# EAGLE board Antenna Board v2 (EAGLE 9.6.2)
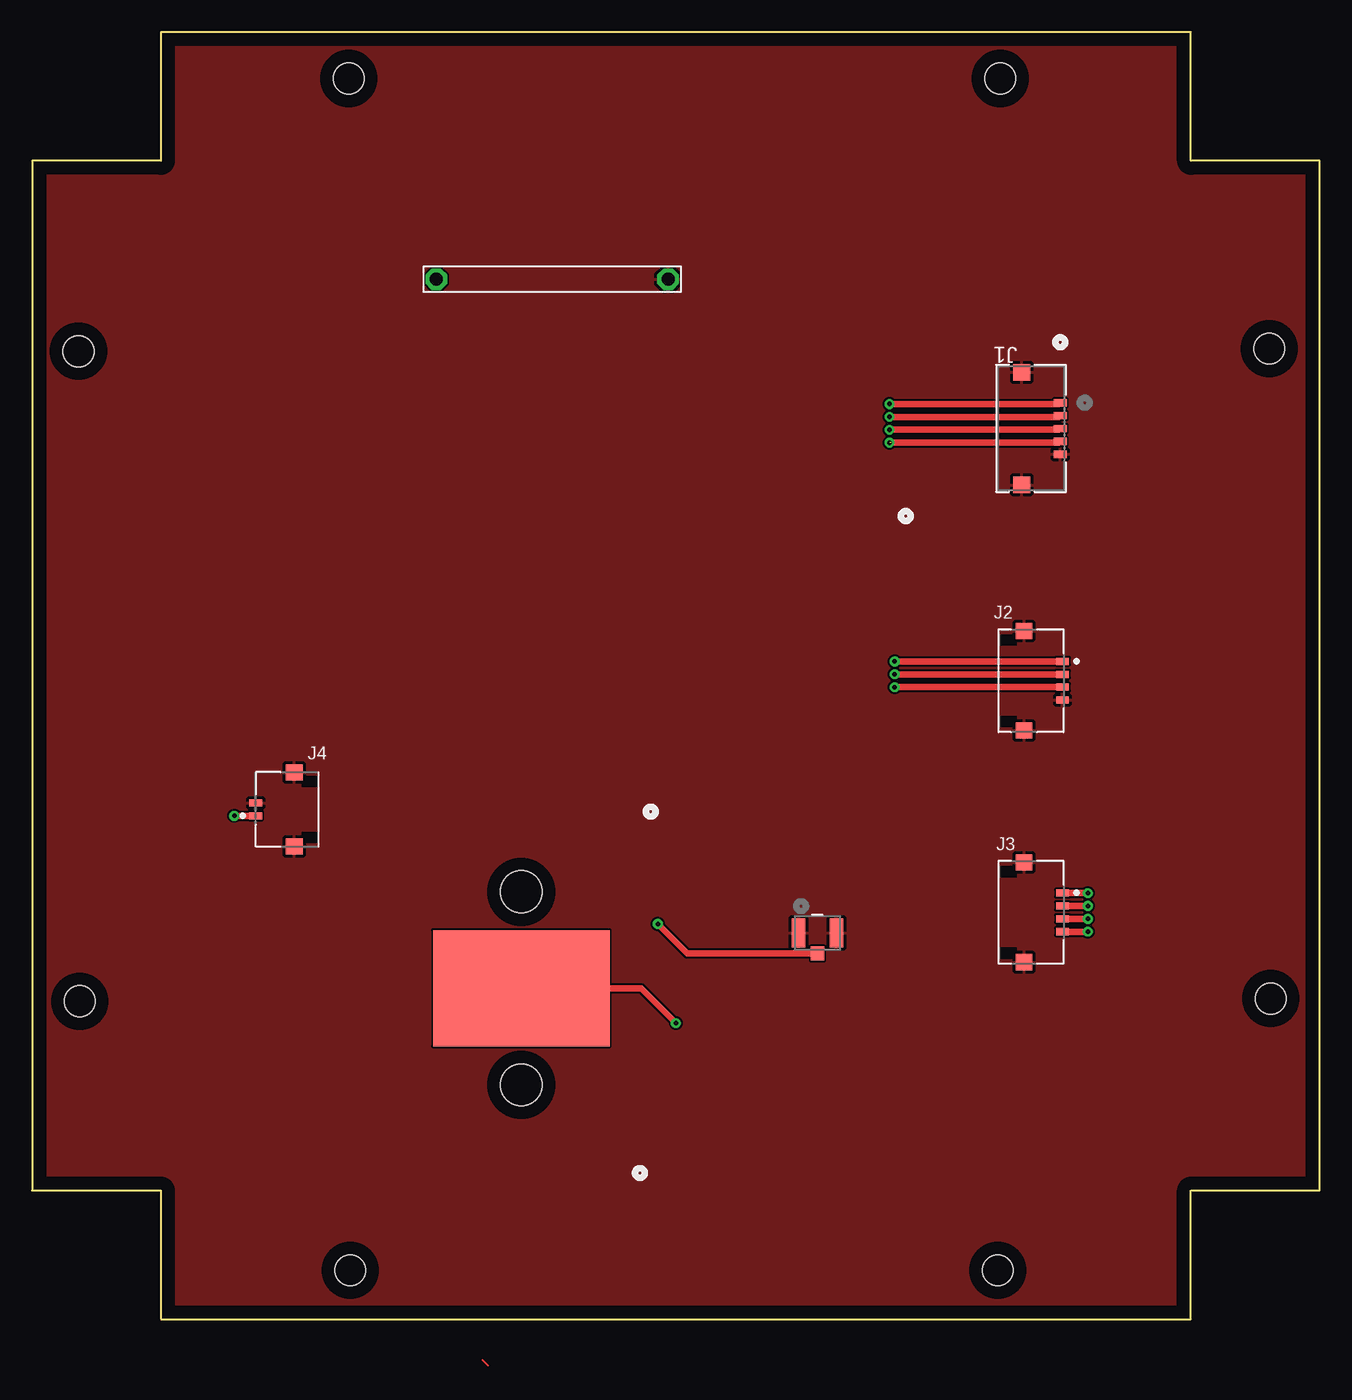
[diagram p0: board, top side]
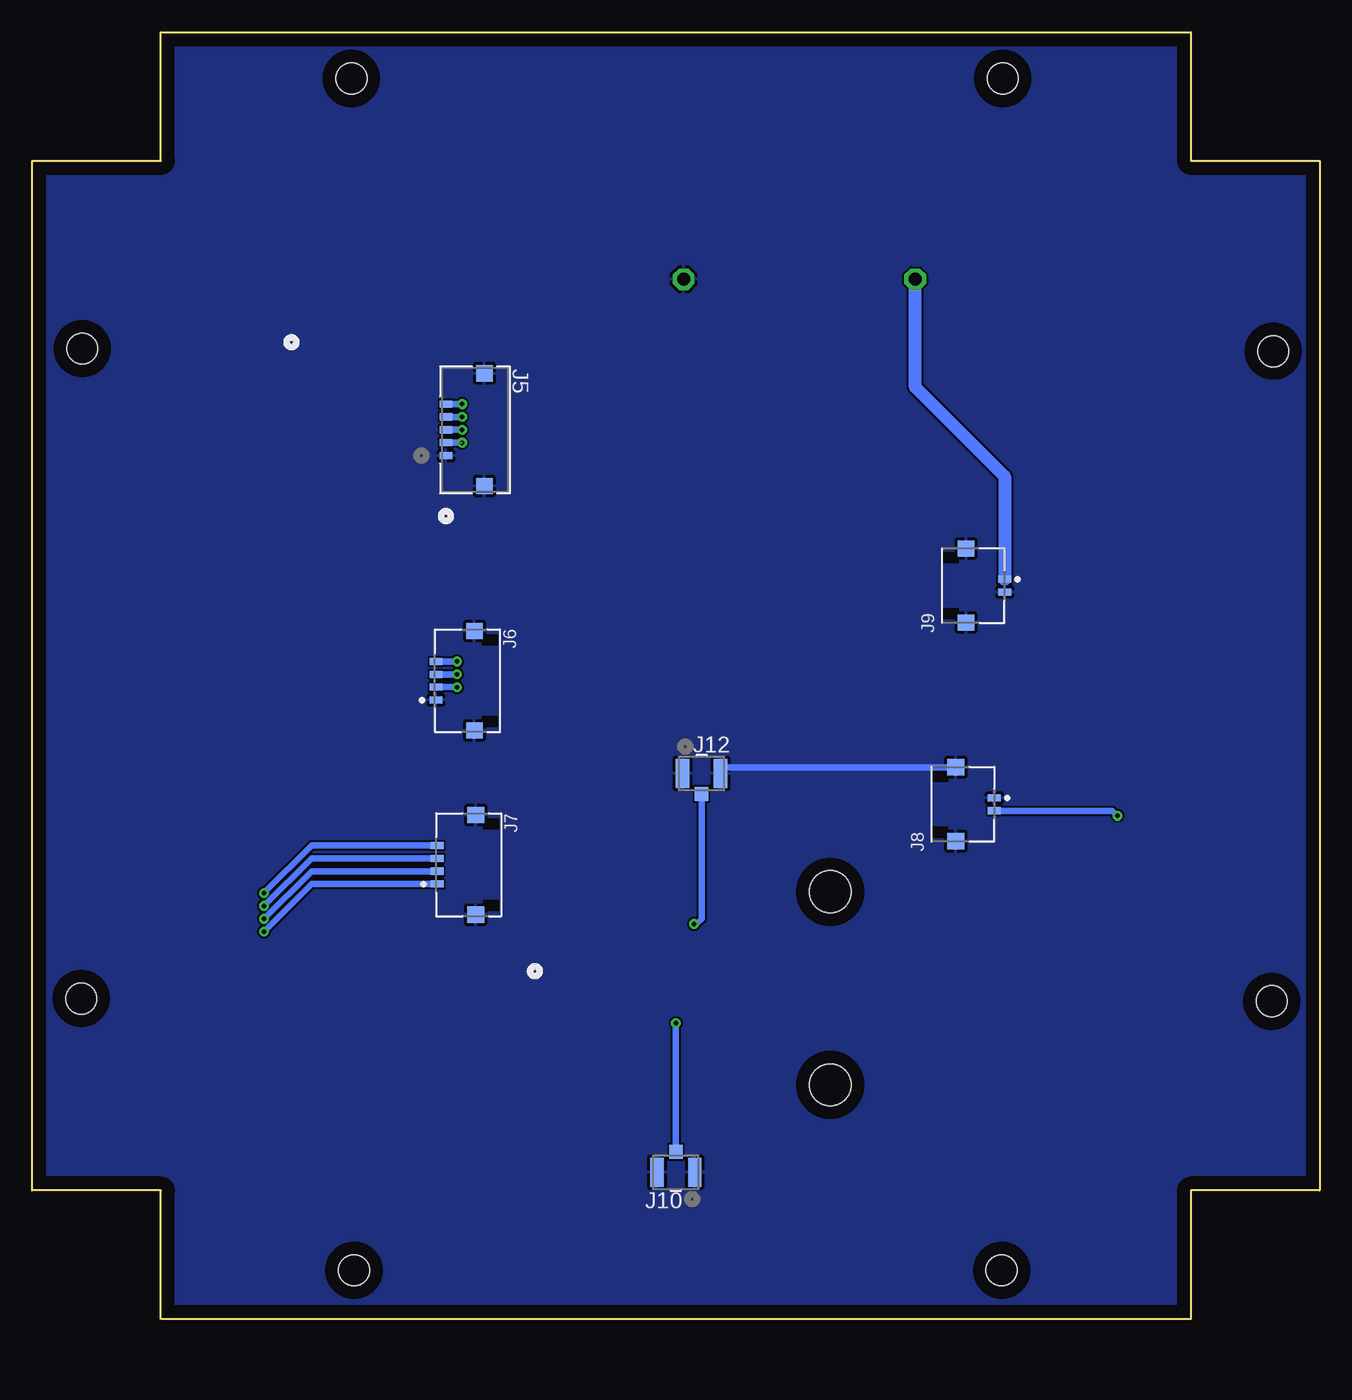
[diagram p1: board, bottom side, seen from below]

Size 100 x 100 mm. Coordinates in mm from the lower left corner, seen from the top.
Outline: 0,10 10,10 10,0 90,0 90,10 100,10 100,90 90,90 90,100 10,100 10,90 0,90 0,10
Copper layers (1*16): Top 0.035mm / dielectric 1.5mm / Bottom 0.035mm
Design rules "default": minimum track width 6mil, minimum drill 0.35mm, track to track 6mil, track to pad 6mil, pad to pad 6mil, via to via 6mil, smd to smd 6mil, copper to edge 40mil, drill to drill 6mil, minimum pad ring 10mil, minimum via ring 8mil, stop-mask expansion 4mil, vias tented up to drill 0mil, thermal gap 10mil
Holes 3.26 mm at 38,18.2 38,33.2
Holes 2.4 mm at 3.7,24.7 24.7,3.8 75,3.8 96.2,24.9 96.1,75.4 75.2,96.4 24.6,96.4 3.6,75.2

## Footprints (pad centres in the part's own frame; a part is rotated, then mirrored left to right if it is on the bottom)
CONN_5037630591_MOL = smd 0.559 x 0.991: 1 -2,2.261; 2 -1,2.261; 3 0,2.261; 4 1,2.261; 5 2,2.261 | smd 1.27 x 1.295: 6 -4.375,-0.729; 7 4.375,-0.729
MOLEX_503763-0491_0 = smd 0.55 x 1: 1 1.5,-2.435; 2 0.5,-2.435; 3 -0.5,-2.435; 4 -1.5,-2.435 | smd 1.26 x 1.3: 5 -3.875,0.555; 6 3.875,0.555
MOLEX_503763-0291_0 = smd 0.55 x 1: 1 0.5,-2.435; 2 -0.5,-2.435 | smd 1.26 x 1.3: 3 -2.875,0.555; 4 2.875,0.555
CONN_-SMT-1(01) = smd 1.041 x 2.261: 1 -1.47,0; 2 1.47,0 | smd 1.041 x 1.092: 3 0,-1.596
ANTENNA_PAD = smd 13.7 x 9: 1 0,0
BURNWIRE = drill 1 pad 1.676 octagon: 1 -9,0; 2 9,0

## Placement (x,y rotation side)
J1  503763-0591  [CONN_5037630591_MOL]  77.6,69.2 270 top
J2  MOLEX_503763-0491MOLEX_503763-0491_0_0  [MOLEX_503763-0491_0]  77.6,49.6 90 top
J3  MOLEX_503763-0491MOLEX_503763-0491_0_0  [MOLEX_503763-0491_0]  77.6,31.6 90 top
J4  MOLEX_503763-0291MOLEX_503763-0291_0_0  [MOLEX_503763-0291_0]  19.8,39.6 270 top
J5  503763-0591  [CONN_5037630591_MOL]  65.6,69.1 90 bottom
J6  MOLEX_503763-0491MOLEX_503763-0491_0_0  [MOLEX_503763-0491_0]  66.2,49.6 270 bottom
J7  MOLEX_503763-0491MOLEX_503763-0491_0_0  [MOLEX_503763-0491_0]  66.1,35.3 270 bottom
J8  MOLEX_503763-0291MOLEX_503763-0291_0_0  [MOLEX_503763-0291_0]  27.7,40 90 bottom
J9  MOLEX_503763-0291MOLEX_503763-0291_0_0  [MOLEX_503763-0291_0]  26.9,57 90 bottom
J10  U.FL-R-SMT-1(01)  [CONN_-SMT-1(01)]  50,11.4 180 bottom
J11  U.FL-R-SMT-1(01)  [CONN_-SMT-1(01)]  61,30 0 top
J12  U.FL-R-SMT-1(01)  [CONN_-SMT-1(01)]  48,42.4 0 bottom
U$2  ANTENNA_PAD  [ANTENNA_PAD]  38,25.7 0 top
U$3  BURNWIRE  [BURNWIRE]  40.4,80.8 0 top

## Library data of the parts
J1 J5 = Improved Molex 503763-0591; BUILT_BY: EMA_Cory; COPYRIGHT: Copyright (C) 2018 Accelerated Designs. All rights reserved; DATASHEET: https://www.molex.com/pdm_docs/sd/5037630591_sd.pdf; MANUFACTURER_PART_NUMBER: 503763-0591; SOURCELIBRARY: Add_to_database_2020-12-14; VENDOR: Molex Connector Corporation
J2 J3 J6 J7 = Molex - 503763-0491; AUTOMOTIVE: No; CENTROID_NOT_SPECIFIED: No; CONN_GENDER: Male; CONN_ORIENTATION: Right Angle; CONTACT_MATERIAL: Gold,Nickel; CURRENT_RATING: 1.5A; DATASHEET: https://www.molex.com/webdocs/datasheets/pdf/en-us/5037630491_PCB_HEADERS.pdf; DEVICE_CLASS_L1: Connectors; DEVICE_CLASS_L2: Headers and Wire Housings; DEVICE_CLASS_L3: unset; DIGIKEY_DESCRIPTION: CONN HEADER 1MM R/A 4CKT; DIGIKEY_PART_NUMBER: WM10655CT-ND; FOOTPRINT_URL: https://www.molex.com/pdm_docs/sd/5037630491_sd.pdf; FOOTPRINT_VARIANT_NAME_0: Recommended_Land_Pattern; HEIGHT: 1.7mm; LEAD_FREE: Yes; MF: Molex; MFG_PACKAGE_IDENT: 503763-0491; MFG_PACKAGE_IDENT_DATE: 0; MFG_PACKAGE_IDENT_REV: 0; MOUSER_PART_NUMBER: 538-503763-0491; MPN: 503763-0491; NUMBER_OF_CONTACTS: 4; NUMBER_OF_ROWS: 1; PACKAGE: HDR4; PITCH: 1mm; PREFIX: J; ROHS: Yes; TEMPERATURE_RANGE_HIGH: +105°C; TEMPERATURE_RANGE_LOW: -40°C; VERIFICATION_VERSION: 0.0.0.1; VOLTAGE_RATING: 150V
J4 J8 J9 = Molex - 503763-0291; CENTROID_NOT_SPECIFIED: No; DATASHEET: http://www.molex.com/pdm_docs/sd/5037630291_sd.pdf; DIGIKEY_DESCRIPTION: CONN HEADER 1MM R/A 2CKT; DIGIKEY_PART_NUMBER: WM10654CT-ND; LEAD_FREE: yes; MF: Molex; MOUSER_PART_NUMBER: 538-503763-0291; MPN: 503763-0291; PACKAGE: HDR02; PREFIX: J; ROHS: yes; TEMPERATURE_RANGE_HIGH: +105°C; TEMPERATURE_RANGE_LOW: -40°C
J10 = U.FL-R-SMT-1(01); BUILT_BY: EMA_Matt; COPYRIGHT: Copyright (C) 2018 Accelerated Designs. All rights reserved; MANUFACTURER_PART_NUMBER: U.FL-R-SMT-1(01); SOURCELIBRARY: Hirose_12_20_2019; VENDOR: Hirose
J11 J12 = U.FL-R-SMT; BUILT_BY: EMA_Matt; COPYRIGHT: Copyright (C) 2018 Accelerated Designs. All rights reserved; MANUFACTURER_PART_NUMBER: U.FL-R-SMT-1(01); SOURCELIBRARY: Hirose_12_20_2019; VENDOR: Hirose
U$2 = Antenna_Pad
U$3 = Burn_Wire

## Nets
ANTENNA: J10.3 U$2.1
D+_HOST: J2.2 J6.3
D+_MICRO: J1.2 J5.4
D-_HOST: J2.3 J6.2
D-_MICRO: J1.3 J5.3
GND: J1.5 J1.6 J1.7 J2.4 J2.5 J2.6 J3.5 J3.6 J4.2 J4.3 J4.4 J5.1 J5.6 J5.7 J6.1 J6.5 J6.6 J7.5 J7.6 J8.1 J8.3 J8.4 J9.2 J9.3 J9.4 J10.1 J10.2 J11.1 J11.2 J12.1 J12.2 U$3.2
ID_MICRO: J1.4 J5.2
ORION-SPACE: J11.3 J12.3
RX+: J3.1 J7.4
RX-: J3.2 J7.3
TX+: J3.3 J7.2
TX-: J3.4 J7.1
VCC_BATT: J4.1 J8.2
VCC_BURN: J9.1 U$3.1
VCC_HOST: J2.1 J6.4
VCC_MICRO: J1.1 J5.5

## Tracks (layer width: path | path; a pad name or v marks a point on that pad's centre or on a via)
ANTENNA  (via drill 0.35)
  Top 0.508: U$2.1 47.3,25.7 v50,23
  Bottom 0.508: J10.3 v50,23
D+_HOST  (via drill 0.35)
  Top 0.508: J2.2 v67,50.1
  Bottom 0.508: J6.3 v67,50.1
D+_MICRO  (via drill 0.35)
  Top 0.508: v66.6,70.1 79.76,70.1 J1.2
  Bottom 0.508: J5.4 v66.6,70.1
D-_HOST  (via drill 0.35)
  Top 0.508: J2.3 v67,49.1
  Bottom 0.508: J6.2 v67,49.1
D-_MICRO  (via drill 0.35)
  Top 0.508: J1.3 79.76,69.1 v66.6,69.1
  Bottom 0.508: J5.3 v66.6,69.1
GND
  Top 0.152: J11.1 59.63,30.1
  Bottom 0.152: J12.2 46.38,42.25
  Bottom 0.508: J8.4 46.05,42.88 J12.2
  pour Top: -1,101 101,101 101,-1 -1,-1
  pour Bottom: -2,102 102,102 102,-2 -2,-2
ID_MICRO  (via drill 0.35)  (1 unrouted)
  Top 0.508: v66.6,68.1 79.76,68.1 J1.4
  Bottom 0.508: J5.2 66.74,68.1
N$1
  Top 0.152: 35,-3.2 35.4,-3.6
ORION-SPACE  (via drill 0.35)
  Top 0.508: J11.3 50.9,28.4 v48.6,30.7
  Bottom 0.508: v48.6,30.7 48.4,30.7 48,31.1 J12.3
RX+  (via drill 0.35)
  Top 0.508: J3.1 v82,33.1
  Bottom 0.508: J7.4 78.3,36.8 v82,33.1
RX-  (via drill 0.35)
  Top 0.508: J3.2 v82,32.1
  Bottom 0.508: v82,32.1 78.3,35.8 J7.3
TX+  (via drill 0.35)
  Top 0.508: J3.3 v82,31.1
  Bottom 0.508: J7.2 78.3,34.8 v82,31.1
TX-  (via drill 0.35)
  Top 0.508: J3.4 v82,30.1
  Bottom 0.508: v82,30.1 78.3,33.8 J7.1
VCC_BATT  (via drill 0.35)
  Top 0.508: J4.1 v15.7,39.1
  Bottom 0.508: v15.7,39.1 16.1,39.5 J8.2
VCC_BURN
  Bottom 1.016: J9.1 24.46,65.48 31.4,72.42 U$3.1
VCC_HOST  (via drill 0.35)
  Top 0.508: J2.1 v67,51.1
  Bottom 0.508: J6.4 v67,51.1
VCC_MICRO  (via drill 0.35)
  Top 0.508: v66.6,71.1 79.76,71.1 J1.1
  Bottom 0.508: J5.5 v66.6,71.1